# Altium PCB front_panel.PcbDoc
Units mm, origin at the board's own origin, x right, y up, seen from the top; angles counter-clockwise.
Board outline 106 x 54.9 mm, 2 copper layers (Top Layer, Bottom Layer), stack 1.571 mm thick; 1 components, 0 nets, 37 pads, 0 vias.
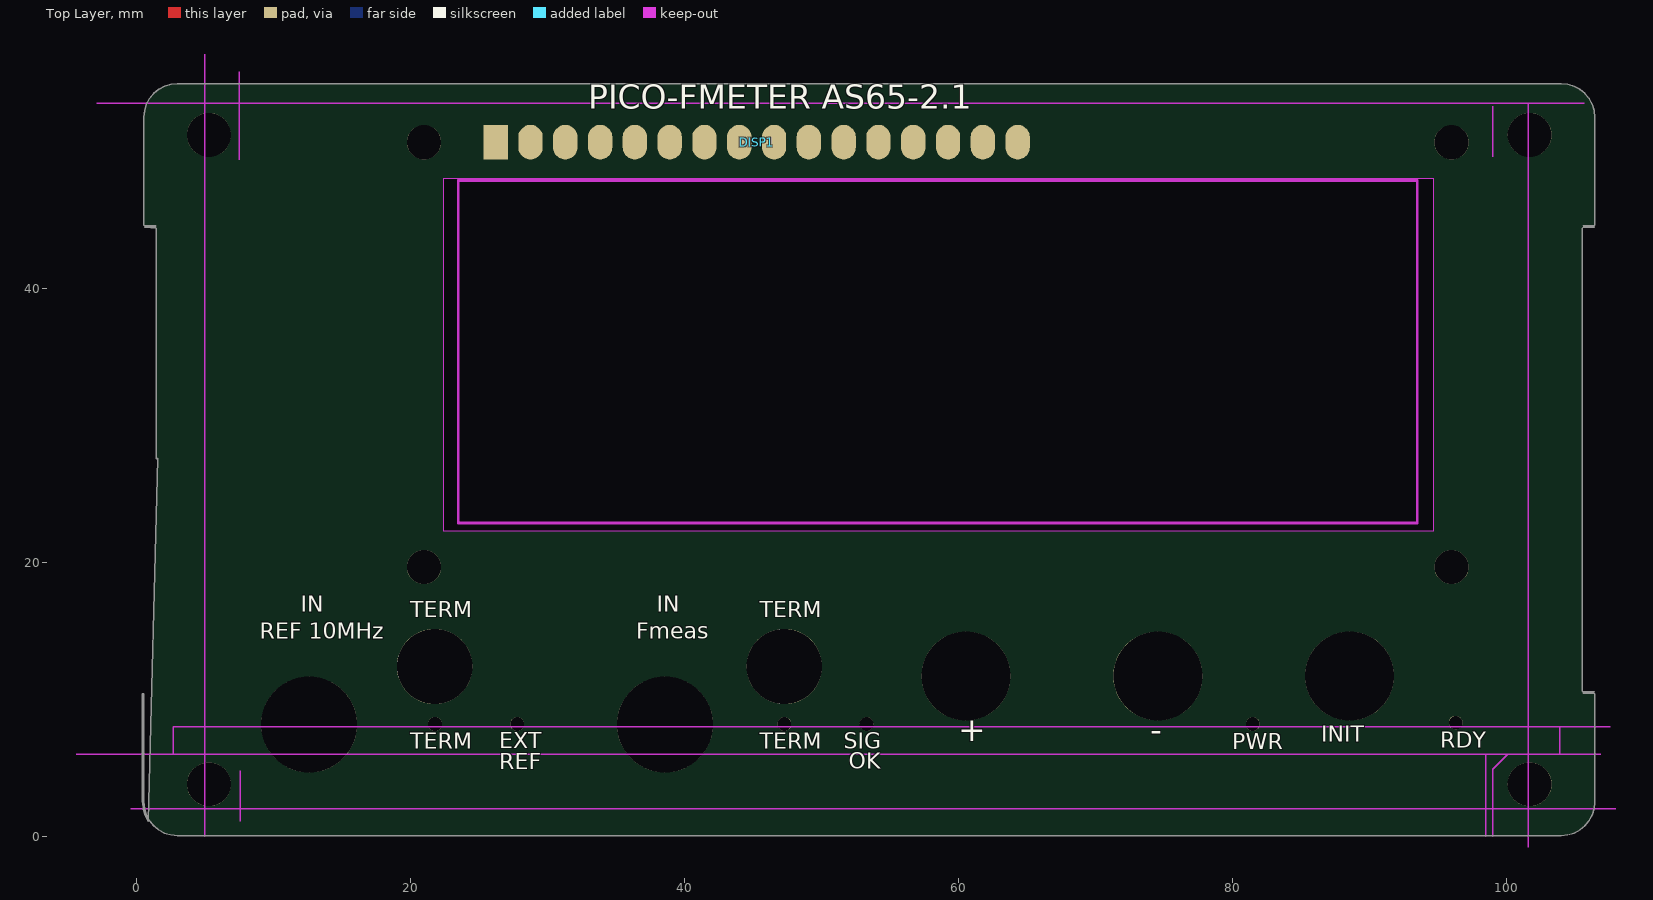
[diagram p0: Top Layer view]
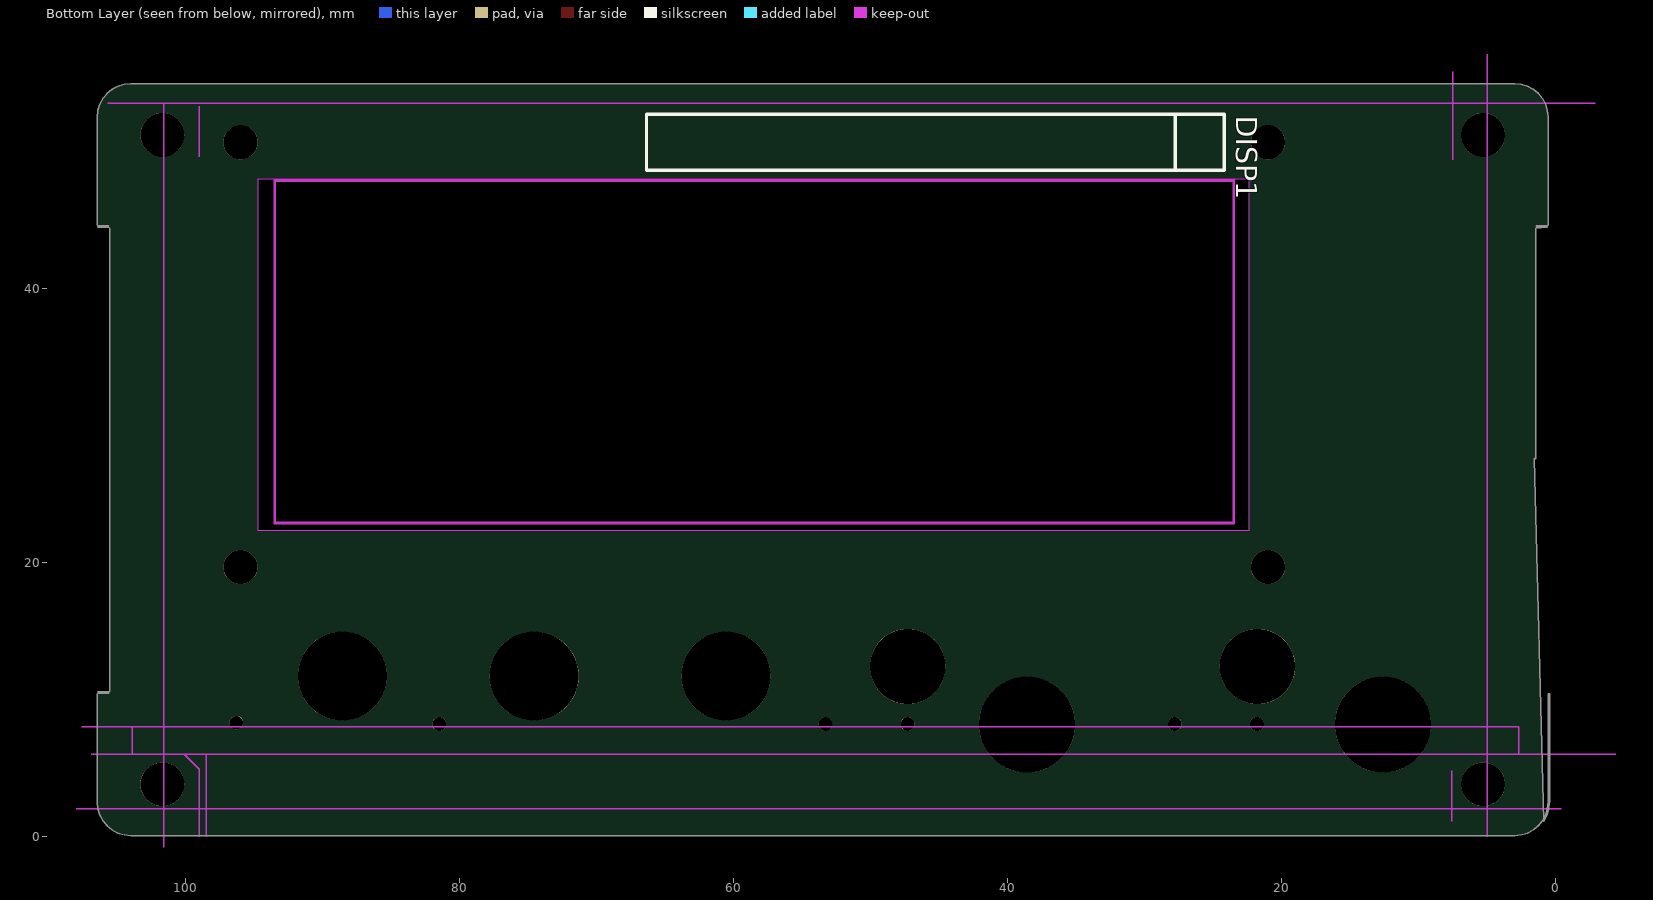
[diagram p1: Bottom Layer view, seen from below]

## Layer stack, top to bottom
Top Solder: solder mask 0.0102, Solder Resist, Dk 3.5
Top Layer: signal copper 0.0356
Dielectric 1: dielectric 1.5, FR-4, Dk 4.8
Bottom Layer: signal copper 0.0356
Bottom Solder: solder mask 0.0102, Solder Resist, Dk 3.5

## Board outline
0.877,1.087 0.646,1.52 0.642,1.529 0.5,1.998 0.498,2.008 0.45,2.495 0.45,2.5 0.45,10.4 0.55,10.398 0.55,2.502 0.598,2.022 0.737,1.563 0.963,1.139 1.268,0.768 1.639,0.463 2.063,0.237 2.522,0.098 3.002,0.05 21.399,0.05 21.4,0.05 85.599,0.05 85.6,0.05 103.998,0.05 104.478,0.098 104.937,0.237 105.361,0.463 105.732,0.768 106.037,1.139 106.263,1.563 106.402,2.022 106.45,2.502 106.45,10.398 106.398,10.45 105.6,10.45 105.602,10.55 106.4,10.55 105.552,10.588 105.552,27.398 105.55,27.412 105.55,44.398 105.602,44.45 106.4,44.45 106.398,44.55 105.6,44.55 106.45,44.602 106.45,52.498 106.402,52.978 106.263,53.437 106.037,53.861 105.732,54.232 105.361,54.537 104.937,54.763 104.478,54.902 103.998,54.95 21.4,54.95 3.002,54.95 2.522,54.902 2.063,54.763 1.639,54.537 1.268,54.232 0.963,53.861 0.737,53.437 0.598,52.978 0.55,52.498 0.55,44.602 0.602,44.55 1.4,44.55 1.398,44.45 0.6,44.45 1.45,44.398 1.45,27.6 ccw(c1.5,27.6) 1.55,27.6
cut-out: 22.4,48 22.4,22.3 94.7,22.3 94.7,48

## Design rules (kind name [scope] priority, off if disabled: settings)
Clearance [All] p1: gap=0.254 ignorepadtopadclearanceinfootprint=FALSE
PolygonConnect [All] p1: connectstyle=Relief reliefconductorwidth=0.254 reliefentries=4 polygonreliefangle="90 Angle" airgapwidth=0.254
RoutingVias [All] p1: holewidth=0.711 width=1.27 viastyle="Through Hole" minholewidth=0.711 minwidth=1.27 maxholewidth=0.711 maxwidth=1.27
SolderMaskExpansion [All] p1: expansion=0.102 istentingtop=FALSE
Width [All] p1: maxlimit=0.254 minlimit=0.254 preferedwidth=0.254
30 further rules are at their usual default settings.

## Components (designator, comment, footprint, x,y, rotation, side; value= is the part's Value field where it differs from the comment)
DISP1 "LCD_HD44780_LED" SIP16 59.249,48.126 r270 bottom

## Footprints (in the part's own frame and the unit in brackets; to place one, negate y for a bottom-side part, rotate by r counter-clockwise, add the part's x,y. Pads: shape width x height; smd on the part's side, far side on the other; paste and mask are expansions set on the pad)
SIP16 [mil] "LCD display connector"
  rect 100x70 smd far side: 1(-100,1300)
  oval 100x70 smd far side: 2(-100,1200) 3(-100,1100) 4(-100,1000) 5(-100,900) 6(-100,800) 7(-100,700) 8(-100,600) 9(-100,500) 10(-100,400) 11(-100,300) 12(-100,200) 13(-100,100) 14(-100,0) 15(-100,-100) 16(-100,-200)
  silkscreen extent -180,-280 -20,1380

## Part data
DISP1: "LCD character display socket with backlight"

## Free pads (board coordinates)
  round 2.5 hole 2.5 unplated: 0(20.997,50.654) 1(95.997,50.654) 2(95.997,19.654) 3(20.997,19.654)
  round 3.2 hole 3.2: 4(5.3,3.8) 4(5.3,51.2) 4(101.7,3.8) 4(101.7,51.2)
  round 7 hole 7: 5(12.617,8.157) 5(38.583,8.157)
  round 5.5 hole 5.5: 5(21.771,12.402) 5(47.299,12.402)
  round 6.5 hole 6.5: 5(60.557,11.702) 5(74.557,11.702) 5(88.557,11.702)
  round 1 hole 1: 6(21.8,8.2) 7(47.3,8.2) 8(53.3,8.2) 9(81.5,8.2) 10(96.3,8.3) 11(27.8,8.2)

## Nets (pads, with @x,y where several pads share a name; then routed paths per layer and width w, separated by ;. In a path a pad name is that pad's centre, name@x,y a point inside that pad or via, vN(x,y) a via of type N, cw(c..) or ccw(c..) an arc to the next point about the centre after c; other vN are vias at no path point)
pads on no net: DISP1.1 DISP1.2 DISP1.3 DISP1.4 DISP1.5 DISP1.6 DISP1.7 DISP1.8 DISP1.9 DISP1.10 DISP1.11 DISP1.12 DISP1.13 DISP1.14 DISP1.15 DISP1.16

## Keep-outs
Keep-Out Layer:
  lines w0.1: -4.4,6 106.9,6 98.5,6 98.5,0 ; -2.9,53.5 105.7,53.5 ; -0.4,2 108,2 ; 0,2 5,2 ; 0,6 2.7,6 2.7,8 5,8 ; 5,0 5,57.1 ; 5,6 5,8 ; 7.5,49.4 7.5,55.8 ; 7.6,1.1 7.6,4.8 ; 99,0 99,0.7 99,4.4 99,4.9 100.1,6 ; 99,49.6 99,53.3 ; 101.6,-0.8 101.6,53.5 ; 103.9,6 103.9,8 106.6,8 ; 107.6,8 5,8
  lines w0.203: 23.499,26.876 23.499,42.876 23.499,47.535 ; 23.499,27.376 23.499,22.876 26.999,22.876 ; 23.499,46.771 23.499,47.867 23.509,47.876 ; 24.111,47.876 23.509,47.876 ; 26.499,22.876 90.499,22.876 93.499,22.876 93.499,28.876 ; 28.499,47.876 92.499,47.876 ; 28.709,47.876 23.509,47.876 ; 91.499,47.876 93.499,47.876 93.499,43.376 ; 93.499,27.876 93.499,43.876

## Silkscreen, mask and mechanical layers (free items; w line width, h text height)
Top Overlay:
  text "PICO-FMETER AS65-2.1" at 33.003,52.539 h3
  text "IN" at 12,16 h2
  text "IN" at 38,16 h2
  text "TERM" at 20,15.6 h2
  text "TERM" at 45.5,15.6 h2
  text "REF 10MHz" at 9,14.026 h2
  text "Fmeas" at 36.5,14.02 h2
  text "INIT" at 86.5,6.5 h2
  text "+" at 60.003,6.372 h3
  text "-" at 74,6.356 h3
  text "RDY" at 95.165,6.053 h2
  text "EXT" at 26.5,6.013 h2
  text "TERM" at 20,6 h2
  text "TERM" at 45.5,6 h2
  text "SIG" at 51.644,5.974 h2
  text "PWR" at 80.002,5.948 h2
  text "OK" at 52,4.526 h2
  text "REF" at 26.5,4.5 h2
Mechanical 1:
  lines w0.1: 1.5,27.4 1.5,10.6 1.498,10.58 1.492,10.562 1.483,10.544 1.471,10.529 1.456,10.517 1.438,10.508 1.42,10.502 1.4,10.5 0.6,10.5 0.58,10.498 0.562,10.492 0.544,10.483 0.529,10.471 0.517,10.456 0.508,10.438 0.502,10.419 0.5,10.4 0.5,2.5 0.548,2.012 0.69,1.543 0.921,1.111 1.232,0.732 1.611,0.421 2.043,0.19 2.512,0.048 3,0 21.4,0 85.6,0 104,0 104.488,0.048 104.957,0.19 105.389,0.421 105.768,0.732 106.079,1.111 106.31,1.543 106.452,2.012 106.5,2.5 106.5,10.4 106.498,10.42 106.492,10.438 106.483,10.456 106.471,10.471 106.456,10.483 106.438,10.492 106.419,10.498 106.4,10.5 105.6,10.5 105.58,10.502 105.562,10.508 105.544,10.517 105.529,10.529 105.517,10.544 105.508,10.562 105.502,10.58 105.502,27.398 105.5,27.4 105.5,44.4 105.502,44.42 105.508,44.438 105.517,44.456 105.529,44.471 105.544,44.483 105.562,44.492 105.58,44.498 105.6,44.5 106.4,44.5 106.42,44.502 106.438,44.508 106.456,44.517 106.471,44.529 106.483,44.544 106.492,44.562 106.498,44.58 106.5,44.6 106.5,52.5 106.452,52.988 106.31,53.457 106.079,53.889 105.768,54.268 105.389,54.579 104.957,54.81 104.488,54.952 104,55 85.6,55 21.4,55 3,55 2.512,54.952 2.043,54.81 1.611,54.579 1.232,54.268 0.921,53.889 0.69,53.457 0.548,52.988 0.5,52.5 0.5,44.6 0.502,44.58 0.508,44.562 0.517,44.544 0.529,44.529 0.544,44.517 0.562,44.508 0.58,44.502 0.6,44.5 1.4,44.5 1.42,44.498 1.438,44.492 1.456,44.483 1.471,44.471 1.483,44.456 1.492,44.438 1.498,44.419 1.5,44.4 1.5,27.6
Mechanical 13:
  lines w0.203: 18.497,17.154 18.497,22.154 18.497,27.154 18.497,53.154 98.497,53.154 98.497,33.654 98.497,22.154 98.497,17.154 18.497,17.154 ; 26.497,27.154 90.497,27.154 90.497,43.154 26.497,43.154 26.497,27.154